# Altium PCB PlanTIeV2.PcbDoc
Units mil, origin at the board's own origin, x right, y up, seen from the top; angles counter-clockwise.
Board outline 1824.05 x 1993.03 mil, 2 copper layers (Top Layer, Bottom Layer); 50 components, 44 nets, 206 pads, 57 vias.
Unrouted connection lines stored in the file: 2.
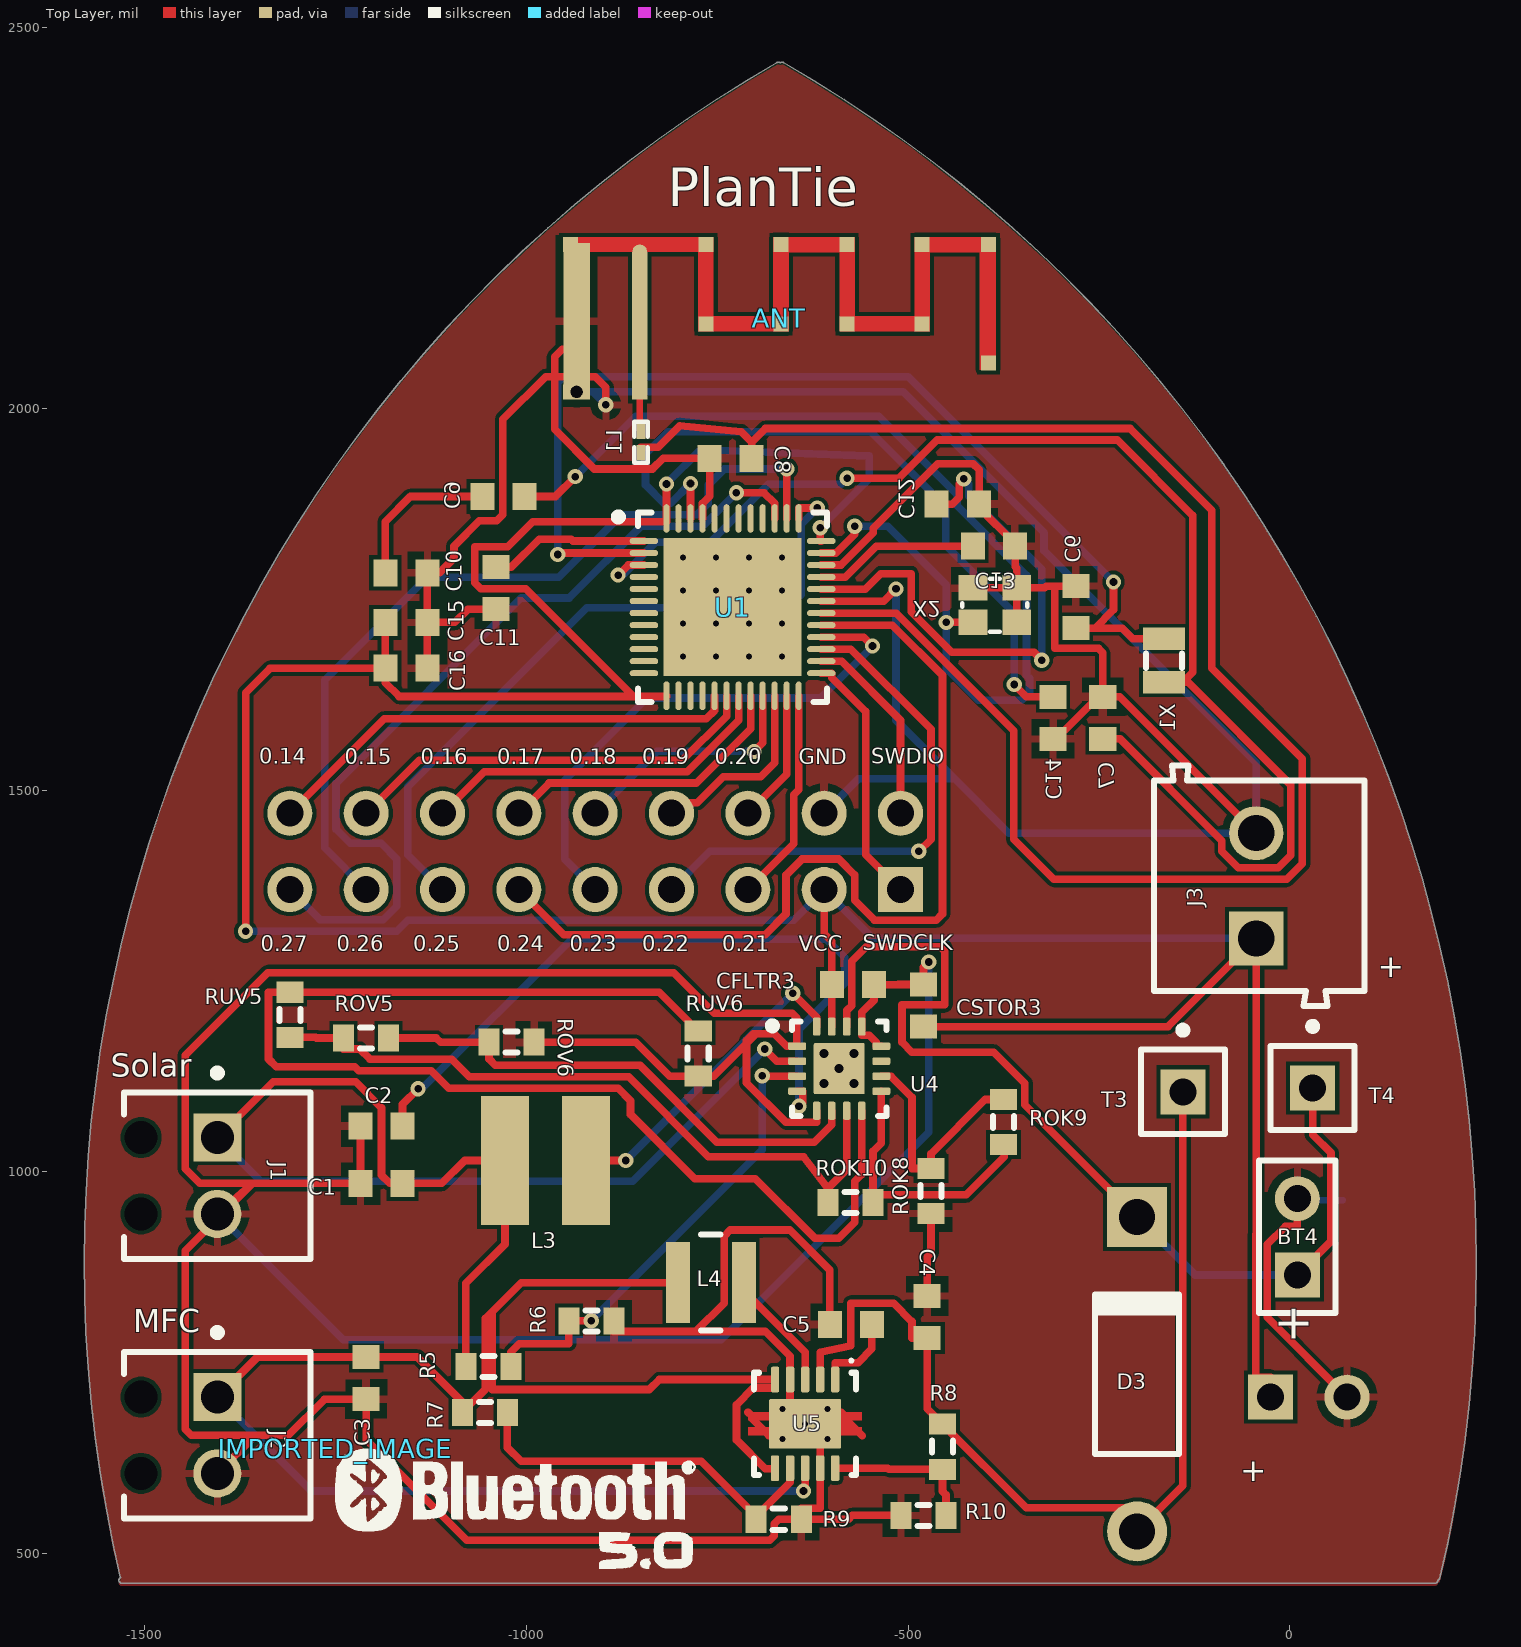
[diagram p0: Top Layer view]
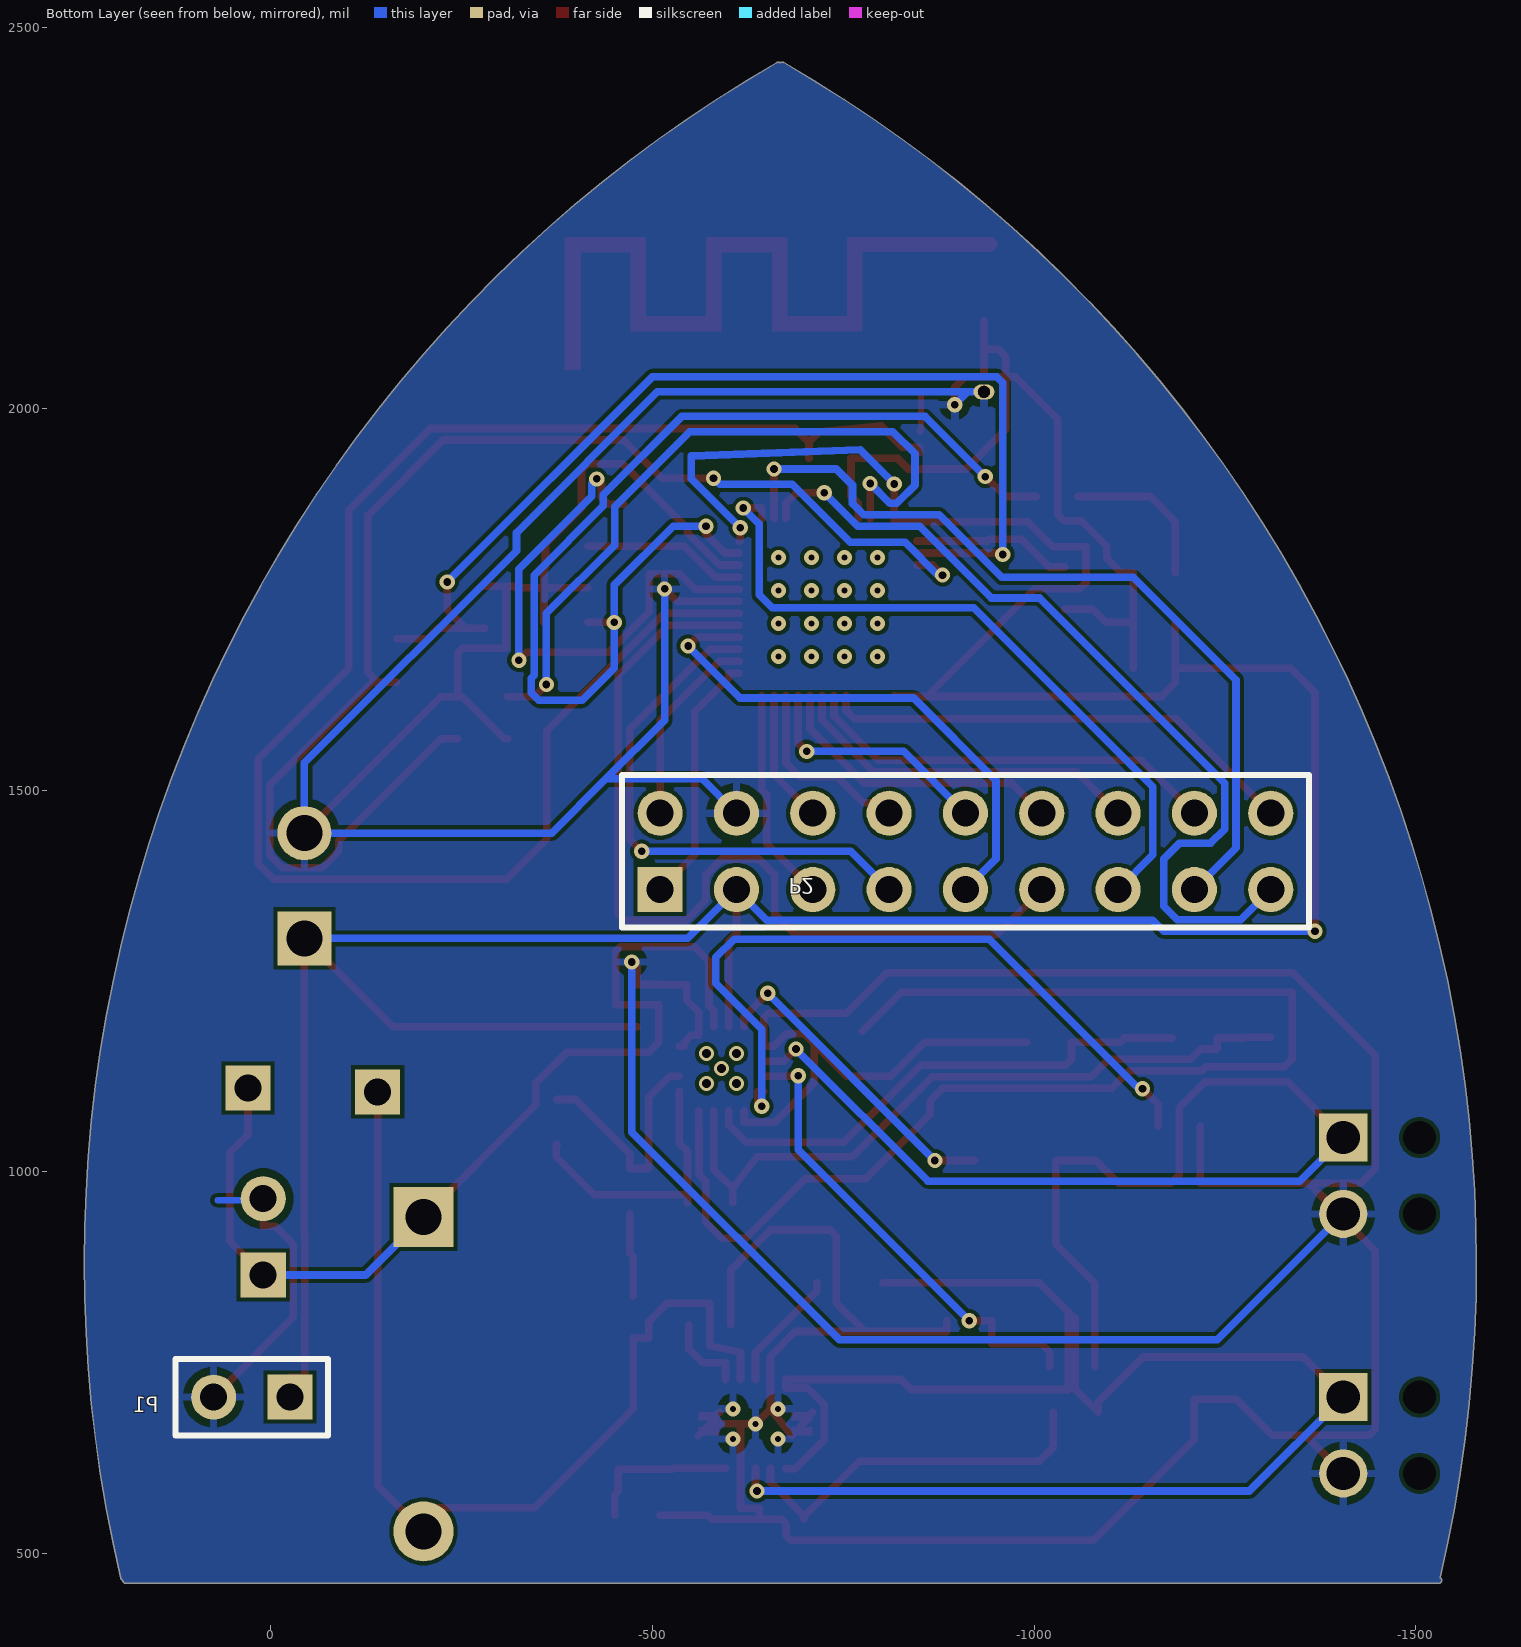
[diagram p1: Bottom Layer view, seen from below]

## Layer stack, top to bottom
Top Solder: solder mask 0.4, Solder Resist, Dk 3.5
Top Layer: signal copper 1.4
Dielectric 1: dielectric 12.6, FR-4, Dk 4.8
Bottom Layer: signal copper 1.4
Bottom Solder: solder mask 0.4, Solder Resist, Dk 3.5

## Board outline
-1530,460.98 cw(c-1530,465) -1531.86,468.56 cw(c-1528.13,470.02) -1532.03,469.11 cw(c235.51,881.61) -672.01,2453.47 cw(c-670,2450) -667.5,2453.14 cw(c-665,2450) -662.99,2453.47 cw(c-1570.51,881.61) 244.52,881.61 cw(c-1570.51,881.61) 196.75,467.91 cw(c192.84,468.82) 194.02,464.99 cw(c190,465) 190,460.99

## Design rules (kind name [scope] priority, off if disabled: settings)
Clearance [All] p1: gap=5 ignorepadtopadclearanceinfootprint=FALSE
PolygonConnect [All] p1: connectstyle=Relief reliefconductorwidth=10 reliefentries=4 polygonreliefangle="90 Angle" airgapwidth=10
RoutingVias [All] p1: holewidth=10 width=20 viastyle="Through Hole" minholewidth=10 minwidth=20 maxholewidth=10 maxwidth=20
SolderMaskExpansion [All] p1: expansion=4 istentingtop=FALSE
Width [All] p1: maxlimit=10 minlimit=10 preferedwidth=10
30 further rules are at their usual default settings.

## Components (designator, comment, footprint, x,y, rotation, side; value= is the part's Value field where it differs from the comment)
ANT "Antenna" BT-AFN -936.62,2032.09 r0 top
BT4 "Battery" BAT-2 10,915 r90 top
C1 "Cap" 1608[0603] -1190,985 r0 top value=100pF
C2 "Cap" 1608[0603] -1190,1060 r0 top value=100pF
C3 "Cap" 1608[0603] -1210,730 r90 top value=10uF
C4 "Cap" 1608[0603] -475,810 r270 top value=10uF
C5 "Cap" 1608[0603] -575,800 r0 top value=1uF
C6 "Cap" 1608[0603] -280,1740 r90 top value=12pF
C7 "Cap" 1608[0603] -245,1595 r90 top value=12pF
C8 "Cap" 1608[0603] -732.56,1935 r180 top value=1.0pF
C9 "Cap" 1608[0603] -1030,1885 r0 top value=12pF
C10 "Cap" 1608[0603] -1157.44,1785 r0 top value=12pF
C11 "Cap" 1608[0603] -1040,1765 r270 top value=100nF
C12 "Cap" 1608[0603] -435,1875 r0 top value=100pF
C13 "Cap" 1608[0603] -387.44,1820 r180 top value=100pF
C14 "Cap" 1608[0603] -310,1595 r270 top value=1.0uF
C15 "Cap" 1608[0603] -1157.44,1720 r0 top value=4.7uF
C16 "Cap" 1608[0603] -1157.44,1660 r0 top value=100nF
CFLTR3 "Cap" 1608[0603] -572.28,1245.43 r0 top value=100pF
CSTOR3 "Cap" 1608[0603] -479.84,1217.99 r90 top value=100pF
D3 "Diodd" DO-41 -200,735 r90 top
IMPORTED_IMAGE "Comment" IMPORTED_IMAGE -1250.48,637.3 r0 top
J1 "1725656" PHOE-1725656-2 -1405,995 r270 top
J2 "1725656" PHOE-1725656-2 -1405,655 r270 top
J3 "691103110002" 691103110002 -40,1375 r90 top
L1 "3.3nH" INDC0603X03L -850,1956.22 r90 top
L3 "744031220" WE-TPC-3816-S -975,1015 r0 top
L4 "LQH3NPZ100MMEL" FP-LQH3NPH_ME-MFG -758.31,855 r180 top
P1 "Header 2" HDR1X2 -25,705 r0 bottom
P2 "Header 9X2" HDR2X9 -510,1370 r180 bottom
R5 "Res3" J1-0603 -1050,745 r0 top value=1K
R6 "Res3" J1-0603 -915,805 r0 top value=1K
R7 "Res3" J1-0603 -1054.53,685 r180 top value=50K
R8 "Res3" J1-0603 -455,640 r90 top value=1M
R9 "Res3" J1-0603 -669.53,545 r180 top value=250K
R10 "Res3" J1-0603 -480,550 r0 top value=180K
ROK8 "Res3" J1-0603 -470,975 r270 top value=1K
ROK9 "Res3" J1-0603 -374.84,1065.43 r90 top value=1K
ROK10 "Res3" J1-0603 -575.47,960 r0 top value=1K
ROV5 "Res3" J1-0603 -1210.31,1175.43 r0 top value=1K
ROV6 "Res3" J1-0603 -1019.53,1170 r0 top value=1K
RUV5 "Res3" J1-0603 -1309.84,1205.91 r90 top value=1K
RUV6 "Res3" J1-0603 -775,1155 r270 top value=1K
T3 "TestPoint" PIN1 -140,1105 r0 top
T4 "TestPoint" PIN1 30,1110 r0 top
U1 "NRF52832-QFAA-R" NRSC-QF-48_M -730,1740 r0 top
U4 "BQ25504RGTT" RGT0016C_V -590.31,1135.32 r0 top
U5 "TPS61200DRCT" DRC0010J_V -635,670 r270 top
X1 "32.768kHz" XTAL_2012 -165,1670 r270 top
X2 "32MHz" BT-XTAL_2016 -386.46,1742.64 r180 top

## Footprints (in the part's own frame and the unit in brackets; to place one, negate y for a bottom-side part, rotate by r counter-clockwise, add the part's x,y. Pads: shape width x height; smd on the part's side, far side on the other; paste and mask are expansions set on the pad)
1608[0603] [mm] "Chip Capacitor, Body 1.6x0.8mm, IPC High Density"
  rect 0.8x0.9 smd: 1(-0.7,0) 2(0.7,0)
  body extent -0.87,-0.48 0.87,0.48, height 1.3
691103110002 [mm] "3,50mm - modular - blue - Horizontal wire entry - Pressure clamp - 8,4mm height - 02p"
  rect 1.8x1.8 hole 1.2: 1(-1.75,0.1)
  round 1.8 hole 1.2: 2(1.75,0.1)
  silkscreen extent -4,-3.5 4,3.5, body extent -4,-3.5 4,3.5, height 8.45
BAT-2 [mm] "Battery; 2 Leads"
  rect 1.5x1.5 hole 0.9: 1(-1.27,0)
  round 1.5 hole 0.9: 2(1.27,0)
  silkscreen extent -2.54,-1.27 2.54,1.27
BT-AFN [mil]
  rect 19.68x19.68 smd: 1(85,-10) ""(-5.55,182.91) ""(85,-10) ""(85,163.23) ""(171.62,78.98) ""(171.62,182.91) ""(270.04,78.98) ""(270.04,182.91) ""(356.65,78.98) ""(356.65,182.91) ""(455.08,78.98) ""(455.08,182.91) ""(541.69,27.8) ""(541.69,182.91)
  oval 19.68x196.85 smd: 1(85,84.49)
  oval 27.56x19.68 hole 15.74: 2(2.32,-10)
  rect 34.65x204.72 smd: 2(2.32,82.52)
  rect 35.43x19.68 smd: GND(2.32,-10)
  Top Layer region: 530.51,18.77 551.7,18.77 551.7,191.41 530.51,191.41
  Top Layer region: 445.23,192.67 445.23,173.02 551.53,173.02 551.53,192.67
  Top Layer region: 358.62,88.81 358.62,69.12 464.96,69.12 464.96,88.81
  Top Layer region: 445.23,192.66 445.23,69.03 464.91,69.03 464.91,192.66
  Top Layer region: 161.78,192.65 161.78,69.03 181.46,69.03 181.46,192.65
  Top Layer region: 161.76,88.72 161.76,69.03 279.87,69.03 279.87,88.72
  Top Layer region: 260.2,192.75 260.2,69.12 279.92,69.12 279.92,192.75
  Top Layer region: 260.15,192.66 260.15,172.97 366.49,172.97 366.49,192.66
  Top Layer region: 346.8,192.66 346.8,69.03 366.49,69.03 366.49,192.66
  Top Layer lines w19.68: -5.55,182.91 2.32,182.91 85,182.91 171.62,182.91
BT-XTAL_2016 [mm]
  rect 0.95x0.85 smd: 1(-0.725,-0.575) 2(0.725,-0.575) 3(0.725,0.575) 4(-0.725,0.575)
  silkscreen extent -1.08,-0.88 1.08,0.88, body extent -1.05,-0.85 1.05,0.85, height 0.56
DO-41 [mm] "Diode, Axial; Body 5.2 x 2.7 mm (LxDia. max), Lead Dia. 0.86 mm (max)"
  round 2 hole 1.2: 1(-5.23,0)
  rect 2x2 hole 1.2: 2(5.23,0)
  silkscreen extent -2.65,-1.4 2.75,1.4
DRC0010J_V [mm] "SON, 10-Leads, Body 3x3mm, Pitch 0.5mm, Thermal Pad 2.4x1.65mm, TI Recommended"
  rrect36% 0.85x0.28 smd paste-0.025 mask+0.07: 1(-1.475,1) 2(-1.475,0.5) 3(-1.475,0) 4(-1.475,-0.5) 5(-1.475,-1) 6(1.475,-1) 7(1.475,-0.5) 8(1.475,0) 9(1.475,0.5) 10(1.475,1)
  rrect6% 1.65x2.4 smd paste-0.825 mask+0.07: 11(0,0)
  Top Layer region: -0.387,1.2 -0.107,1.2 -0.107,1.9 -0.387,1.9
  Top Layer region: 0.393,1.9 0.113,1.9 0.113,1.2 0.393,1.2
  Top Layer region: 0.393,-1.2 0.113,-1.2 0.113,-1.9 0.393,-1.9
  Top Layer region: -0.387,-1.9 -0.107,-1.9 -0.107,-1.2 -0.387,-1.2
  silkscreen extent -2.15,-1.7 1.7,1.7, body extent -1.55,-1.55 1.55,1.55, height 1
FP-LQH3NPH_ME-MFG [mm]
  rect 0.8x2.7 smd paste+0 mask+0: 1(-1.1,0) 2(1.1,0)
  silkscreen extent -0.33,-1.6 0.33,1.6, body extent -1.7,-1.7 1.7,1.7, height 0.25
HDR1X2 [mm] "Connector; Header; 2 Position"
  rect 1.5x1.5 hole 0.9: 1(0,0)
  round 1.5 hole 0.9: 2(2.54,0)
  silkscreen extent -1.27,-1.27 3.81,1.27
HDR2X9 [mm] "Connector; Header; 9x2 Position"
  rect 1.5x1.5 hole 0.9: 1(0,0)
  round 1.5 hole 0.9: 2(0,2.54) 3(2.54,0) 4(2.54,2.54) 5(5.08,0) 6(5.08,2.54) 7(7.62,0) 8(7.62,2.54) 9(10.16,0) 10(10.16,2.54) 11(12.7,0) 12(12.7,2.54) 13(15.24,0) 14(15.24,2.54) 15(17.78,0) 16(17.78,2.54) 17(20.32,0) 18(20.32,2.54)
  silkscreen extent -1.27,-1.27 21.59,3.81
IMPORTED_IMAGE [mil]
  silkscreen extent 0,-157 472,0
INDC0603X03L [mm]
  rect 0.5x0.3 smd: 1(-0.35,0) 2(0.35,0)
  silkscreen extent -0.68,-0.23 0.68,0.23, body extent -0.31,-0.16 0.31,0.16, height 0.26
J1-0603 [mm] "Chip Resistor, Body 1.6x0.8mm, IPC High Density"
  rect 0.7x0.9 smd: 1(-0.75,0) 2(0.75,0)
  silkscreen extent -0.2,-0.35 0.2,0.35, body extent -0.85,-0.48 0.85,0.48, height 0.9
NRSC-QF-48_M [mm] "QFN, 48-Leads, Body 6.00x6.00mm, Pitch 0.40mm, Thermal Pad 4.60x4.60mm, IPC Low Density"
  oval 0.95x0.2 smd: 1(-2.95,2.2) 2(-2.95,1.8) 3(-2.95,1.4) 4(-2.95,1) 5(-2.95,0.6) 6(-2.95,0.2) 7(-2.95,-0.2) 8(-2.95,-0.6) 9(-2.95,-1) 10(-2.95,-1.4) 11(-2.95,-1.8) 12(-2.95,-2.2) 25(2.95,-2.2) 26(2.95,-1.8) 27(2.95,-1.4) 28(2.95,-1) 29(2.95,-0.6) 30(2.95,-0.2) 31(2.95,0.2) 32(2.95,0.6) 33(2.95,1) 34(2.95,1.4) 35(2.95,1.8) 36(2.95,2.2)
  oval 0.2x0.95 smd: 13(-2.2,-2.95) 14(-1.8,-2.95) 15(-1.4,-2.95) 16(-1,-2.95) 17(-0.6,-2.95) 18(-0.2,-2.95) 19(0.2,-2.95) 20(0.6,-2.95) 21(1,-2.95) 22(1.4,-2.95) 23(1.8,-2.95) 24(2.2,-2.95) 37(2.2,2.95) 38(1.8,2.95) 39(1.4,2.95) 40(1,2.95) 41(0.6,2.95) 42(0.2,2.95) 43(-0.2,2.95) 44(-0.6,2.95) 45(-1,2.95) 46(-1.4,2.95) 47(-1.8,2.95) 48(-2.2,2.95)
  rect 4.6x4.6 smd: 49(0,0)
  silkscreen extent -3.92,-3.15 3.15,3.15, body extent -3,-3 3,3, height 0.9
PHOE-1725656-2 [mm] "Connector, 2-Leads, Body 6.2x5.4mm, Pitch 2.54mm"
  rect 1.6x1.6 hole 1.1: 1(-1.27,0)
  round 1.6 hole 1.1: 2(1.27,0)
  round 0 hole 1.1 unplated: MH1(-1.27,-2.54) MH2(1.27,-2.54)
  silkscreen extent -3.54,-3.1 2.77,3.1, body extent -2.77,-3.1 2.77,3.1, height 9
PIN1 [mm] "Generic Antenna; 1 Lead"
  rect 1.5x1.5 hole 0.9: 1(0,0)
  silkscreen extent -1.4,-1.4 1.4,2.17
RGT0016C_V [mm] "QFN, 16-Leads, Body 3x3mm, Pitch 0.5mm, Thermal Pad 1.65x1.65mm"
  rrect40% 0.6x0.25 smd: 1(-1.4,0.75) 2(-1.4,0.25) 3(-1.4,-0.25) 4(-1.4,-0.75) 9(1.4,-0.75) 10(1.4,-0.25) 11(1.4,0.25) 12(1.4,0.75)
  rrect40% 0.25x0.6 smd: 5(-0.75,-1.4) 6(-0.25,-1.4) 7(0.25,-1.4) 8(0.75,-1.4) 13(0.75,1.4) 14(0.25,1.4) 15(-0.25,1.4) 16(-0.75,1.4)
  rrect6% 1.7x1.7 smd paste-0.85: 17(0,0)
  rrect6% 1.55x1.55 on Top Paste: 17(0,0)
  silkscreen extent -2.35,-1.58 1.58,1.58, body extent -1.5,-1.5 1.5,1.5, height 1
WE-TPC-3816-S [mm] "SMD Inductor, 2-Leads, Body 3.8 x 3.8 mm"
  rect 1.6x4.3 smd: 1(-1.35,0) 2(1.35,0)
  body extent -1.9,-1.9 1.9,1.9, height 1.64
XTAL_2012 [mm]
  rect 0.75x1.4 smd: 1(-0.725,0) 2(0.725,0)
  silkscreen extent -0.24,-0.6 0.24,0.6, body extent -1,-0.61 1,0.61, height 0.6

## Part data
BT4: "Multicell Battery", LatestRevisionDate=17-Jul-2002, LatestRevisionNote="Re-released for DXP Platform.", PackageDescription="Battery; 2 Leads", PackageReference=BAT-2, Published=24-Mar-1999, Publisher="Altium Limited"
C1 C2 C3 C4 C5 C6 C7 C8 C9 C10 C11 C12 C13 C14 C15 C16 CFLTR3 CSTOR3: "Capacitor", LatestRevisionDate=17-Jul-2002, LatestRevisionNote="Re-released for DXP Platform.", PackageDescription="Radial Cap, Thru-Hole; 2 Leads; 0.3 in Pin Spacing", PackageReference=RAD-0.3, Published=8-Jun-2000, Publisher="Altium Limited"
D3: library part "Diode 1N4934", "1 Amp Fast Recovery Rectifier", Code_JEDEC=DO-204-AL, ComponentLink1Description="Manufacturer Link", ComponentLink1URL=http://www.fairchildsemi.com/, ComponentLink2Description=Datasheet, ComponentLink2URL=http://www.fairchildsemi.com/ds/1N%2F1N4934.pdf, DatasheetVersion=1999, LatestRevisionDate=17-Jul-2002, LatestRevisionNote="Re-released for DXP Platform.", PackageDescription="Diode, Axial; Body 5.2 x 2.7 mm (LxDia. max), Lead Dia. 0.86 mm (max)", PackageReference=DO-41, PackageVersion=Aug-1999, Published=8-Jun-2000, Publisher="Altium Limited"
J1 J2: library part CMP-2000-05299-1, "Male Header, Pitch 2.54 mm, 1 x 2 Position, Height 9 mm, Tail Length 3.5 mm", Colour=Green, Manufacturer="Phoenix Contact", Content=250pc(s), Datasheet URL=http://datasheet.octopart.com/1725656-Phoenix-Contact-datasheet-5302866.pdf, Datasheet Version=Apr-08, Industrial packaging=Yes, Manufacturer part No.=1725656, Manufacturer URL=http://www.phoenixcontact.com/, Number of contacts=2, Pitch=2.54mm, Type=MPT0,5/2-2,54
J3: library part CMP-1502-03254-1, "Series 1031 - 3.50 mm Horizontal Entry Modular with Pressure Clamp WR-TBL, 2 pin", Manufacturer="Wurth Elektronik", Operating Temperature=-40to105degC, Datasheet URL=http://katalog.we-online.de/em/datasheet/6911031100xx.pdf, Manufacturer URL=http://www.we-online.de, Mounting Technology=THT, Package Reference=691103110002, Packaging=Box, Part Number=691103110002, Pin Number=2, Pitch=3.50mm, Publisher=WurthElektronik
L1: library part L0201-3n3, "High frequency chip inductor ±5%", Artikkelnr Noca=N.A., Artikkelnr Simpro=N.A., Footprint Doc=0201, LatestRevisionDate=2013-04-10, Note="High frequency chip inductor ±5%", Part Number=L0201-3n3, Pin Count=2, Published=2013-04-10, Publisher="Nordic Semiconductor"
L3: library part CMP-0227-00346-1, "SMD Shielded Tiny Power Inductor WE-TPC, L = 22.0 µH", Inductance="22.0 ÂµH", ComponentLink1Description="Manufacturer Link", ComponentLink1URL=http://www.we-online.com, ComponentLink2Description=Datasheet, ComponentLink2URL=http://www.we-online.de/katalog/media/pdf/744031220.pdf, DatasheetVersion="ver 6, Jan-2009", PackageDescription="SMD Inductor, 2-Leads, Body 3.8 x 3.8 mm", PackageReference=WE-TPC-3816-S, PackageVersion=2009
L4: library part CMP-06042-007129-1, "Wire Wound Ferrite Inductor for Power Lines For Automotive 10μH ±20% 0.228Ω 1280mA 1212", Case Code (Imperial)=1212, Case Code (Metric)=3030, Current Rating=1.28A, DC Resistance (DCR)=228mR, Inductance=10uH, Max Operating Temperature=85°C, Min Operating Temperature=-40°C, Ratings=AEC-Q200, Resistor Type=Wirewound, Saturation Current=810mA, Self Resonant Frequency=20MHz, Test Frequency=1MHz, Tolerance=20%, Case/Package=1212, Core Material=Ferrite, Mount="Surface Mount", Packaging="Cut Tape", Shielding=Shielded
P1: "Header, 2-Pin", LatestRevisionDate=17-Jul-2002, LatestRevisionNote="Re-released for DXP Platform.", Publisher="Altium Limited"
P2: "Header, 9-Pin, Dual row", LatestRevisionDate=17-Jul-2002, LatestRevisionNote="Re-released for DXP Platform.", Publisher="Altium Limited"
R5 R6 R7 R8 R9 R10 ROK8 ROK9 ROK10 ROV5 ROV6 RUV5 RUV6: "Resistor", LatestRevisionDate=29-May-2009, LatestRevisionNote="IPC-7351 Footprint Added.", PackageDescription="Chip Resistor", PackageReference=J1-0603, Published=8-Jun-2000, Publisher="Altium Limited"
U1: library part CMP-2100-03661-1, "Multiprotocol Bluetooth Smart, ANT/ANT+ and Proprietary System-on-Chip, 2.4 GHz, 256 KB FLASH, 1.7 to 3.6 V, -40 to 85 degC, 48-Pin QFN, RoHS, Tape and Reel", Frequency=2.4GHz, Manufacturer="Nordic Semiconductor", Max Operating Temperature=85degC, Min Operating Temperature=-40degC, Package Description="48-Pin Quad Flat No-lead Package, Body 6 x 6 mm, Pitch 0.4 mm, Thermal Pad 4.6 x 4.6 mm", Package Reference=QF-48, Datasheet URL=http://infocenter.nordicsemi.com/pdf/nRF52832_PS_v1.0.pdf, Datasheet Version="Rev. 1.0, 02/2016", Lead Free=LeadFree, Manufacturer URL=http://www.nordicsemi.com/eng/Products/, Max Frequency=2.4GHz, Mount=SurfaceMount, Packaging=TapeandReel, RoHSCompliant=true
U4: library part CMP-0321-00258-2, "Ultra Low Power Boost Converter with Battery Management for Energy Harvester App, 0.13 V, -40 to 85 degC, 16-pin QFN (RGT), Green (RoHS & no Sb/Br)", Manufacturer="Texas Instruments", Over Voltage Protection=N, Code_JEDEC=MO-220, ComponentLink1Description=Datasheet, ComponentLink1URL=http://www.ti.com/general/docs/lit/getliterature.tsp?genericPartNumber=BQ25504&fileType=pdf, DatasheetVersion=SLUSAH0, Eco-Plan="Green (RoHS & no Sb/Br)", Lead Acid=N, Li-Ion=N, Li-Polymer=N, Mounting Technology="Surface Mount", NiCd=N, NiMH=N, PackageDescription="16-Pin Plastic Quad Flat No-Lead, 3 x 3 mm Body, 0.5 mm Pitch, 1.7 x 1.7 mm Exposed Pad", PackageReference=RGT0016C, PackageVersion="revH, Oct-2011", PartNumber=BQ25504RGTT, SubFamily="Battery Charge Management", Vin(Min)(V)=0.13
U5: library part CMP-0347-00023-2, "Boost Voltage Converter with 0.3 to 5.5 V Input and 1.8 to 5.5 V Output, -40 to 85 degC, 10-Pin SON (DRC), Green (RoHS & no Sb/Br)", Manufacturer="Texas Instruments", Switching Frequency(Max)(kHz)=1250, ComponentLink1Description=Datasheet, ComponentLink1URL=http://www.ti.com/general/docs/lit/getliterature.tsp?genericPartNumber=TPS61200&fileType=pdf, ComponentLink2Description="Package Specification", ComponentLink2URL=http://www.ti.com/litv/pdf/mpds117k, DatasheetVersion=SLVS577B, Eco-Plan="Green (RoHS & no Sb/Br)", Mounting Technology="Surface Mount", PackageDescription="10-Pin Plastic Small Outline No-Lead, 3 x 3 x 1 mm Body, 0.5 mm Pitch, Exposed Pad", PackageReference=DRC0010J, PackageVersion="revL, Sep-2011", PartNumber=TPS61200DRCT, Regulated Outputs(#)=1, SubFamily="Step-Up Regulator", Synchronous Rectification=TRUE, Topology=Boost, Vin(Max)(V)=5.5, Vin(Min)(V)=0.3, Vout(Max)(V)=5.5, Vout(Min)(V)=1.8
X1: library part XTAL_SMD2012_32.768kHz_9pF_Seiko, "XTAL SMD 2012, 32.768kHz, Cl=9pF, Total Tol: ±50ppm", Manufacturer=Seiko, Manufacturer Part Number=SC20S-9.0PF20PPM, Artikkelnr Noca=N.A., Artikkelnr Simpro=N.A., Datasheet=http://www.sii.co.jp/en/quartz/files/2013/03/file_PRODUCT_MASTER_50811_GRAPHIC03.pdf, Footprint Doc=XTAL_2012, LatestRevisionDate=2015-10-15, Note="XTAL SMD 32.768kHz, 2012", Part Number=XTAL_SMD2012_32.768kHz_9pF_Seiko, Pin Count=2, Published=2015-10-15, Publisher="Nordic Semiconductor"
X2: library part XTAL_SMD2016_32MHz_8pF_Epson, "XTAL SMD 2016, 32MHz, Cl=8pF, Total Tol: ±40ppm", Manufacturer="Epson Toyocom", Manufacturer Part Number=Q22FA12800025, Supplier part number=171-2806, Artikkelnr Noca=N.A., Artikkelnr Simpro=N.A., Datasheet=http://www.epsondevice.com/docs/qd/en/DownloadServlet?id=ID000449, Footprint Doc=XTAL_2016, LatestRevisionDate=2014-11-27, Note="XTAL SMD 32.000MHz", Part Number=XTAL_SMD2016_32MHz_8pF_Epson, Pin Count=4, Published=2012-03-09, Publisher="Nordic Semiconductor", Supplier=Farnell

## Via types
v1: diameter 20, hole 10, Top Layer to Bottom Layer, 31 vias
v2: diameter 19.68, hole 7.87, Top Layer to Bottom Layer, 21 vias
v3: diameter 19.68, hole 11.81, Top Layer to Bottom Layer, 5 vias

## Nets (pads, with @x,y where several pads share a name; then routed paths per layer and width w, separated by ;. In a path a pad name is that pad's centre, name@x,y a point inside that pad or via, vN(x,y) a via of type N, cw(c..) or ccw(c..) an arc to the next point about the centre after c; other vN are vias at no path point)
GND: ANT.2 BT4.2 C1.1 C2.1 C3.1 C4.1 C5.1 C6.2 C7.2 C8.2 C10.2 C11.2 C12.2 C13.1 C14.2 C15.2 C16.2 CFLTR3.2 CSTOR3.2 J1.2 J2.2 J3.2 P1.2 P2.4 R6.2 R9.1 R10.1 ROK8.2 ROV6.2 RUV6.2 U1.31 U1.34 U1.45 U4.1 U4.5 U4.12 U4.13 U5.4 U5.9 U5.11 X2.1 X2.2 X2.4 | length 11192.6
  Top Layer w10: J2.2 -1355,655 ; J1.2 -1359,985 ; C2.1 C1.1 -1359,985 ; C16.2 C15.2 ; C11.2 -1076.56,1737.44 -1094,1720 C15.2 ; ROV6.2 -856.73,1170 -812.2,1125.47 RUV6.2 -754.53,1125.47 -711.84,1168.16 ; ANT.2@-934.3,2114.61 ANT.2@-934.3,2078 ; v1(-896,2005) -896,2028 -910,2042 ANT.2@-934.3,2042 ; R6.2 -885.47,791 -778,791 ; U1.45 -769.37,1876.11 -760.12,1885.36 C8.2 -821,1935 -835,1921 -911,1921 -963,1973 -963,2042 ; -709.8,685.24 -704.29,679.73 -704.29,676.58 -682.24,654.53 -658.43,684.91 -656.75,687.05 U5.11@-654.68,689.68 ; U4.1 U4.1@-646,1164.84 ; U4.5 -619.84,1065.07 -660,1065.07 -711.84,1116.91 -711.84,1168.16 ; U1.31 -531.87,1747.87 v1(-515.87,1763.87) ; U1.34 -588,1795.12 -545.83,1837.28 -545.83,1843.17 -461,1928 -415,1928 -407,1920 -407,1875 C12.2 -407.44,1870.56 -359.88,1823 C13.1 -359.88,1792.97 -357.91,1791 X2.1 ; C5.1 -602.56,871.56 -655,924 -733,924 -741,916 -741,828 -778,791 ; -587.76,685.24 -582.24,679.73 -582.24,676.58 -575.66,670 ; -560.2,654.53 -575.66,670 ; U4.12 -542,1164.84 -542,1170 -551,1179 -560.79,1179 U4.13 -560.79,1209 -544.72,1225.06 CFLTR3.2 -513,1245.43 -512.88,1245.55 CSTOR3.2 -479.84,1268.16 v1(-473,1275) ; R10.1 -573,550 -578,545 R9.1 ; C4.1 -475,889 -470,894 ROK8.2 ; X2.2 X2.1 ; X2.4 X2.1 ; C14.2 -306,1567.44 -250.88,1622.56 C7.2 ; C6.2 -308,1767.56 ; J3.2 -222.6,1622.56 C7.2 ; BT4.2 10,929 -5.53,929 -29.53,905 -29.53,809.53 P1.2 ; -1359,985 -1428,985 -1447,1004 -1447,1153 -1339,1261 -807,1261 -754,1208 -652,1208 -646,1202 U4.1@-646,1164.84 ; -1359,985 -1447,897 -1447,663 -1439,655 -1355,655 ; -1355,655 -1312,655 -1264.56,702.44 C3.1 -1210,649 -1078.28,517.28 -681.13,517.28 -675.28,523.14 -675.28,539.14 -669.42,545 R9.1 ; C15.2 C10.2 -1114,1785 -1095,1804 -1095,1820 -1062,1853 -1039,1853 -1031,1861 -1031,1986 -975,2042 -963,2042 ; -963,2042 ANT.2@-934.3,2042 ; -963,2042 -963,2068 -953,2078 ANT.2@-934.3,2078 ; ANT.2@-934.3,2042 ANT.2@-934.3,2078 ; -778,791 -687,791 -654.68,758.68 U5.4 U5.11@-654.68,689.69 ; -711.84,1168.16 -711.84,1172.16 -703,1181 -699,1181 ; -711.84,1168.16 -699,1181 ; -699,1181 -675.16,1181 -659,1164.84 U4.1@-646,1164.84 ; U5.11@-654.68,689.68 v2(-635,670) U5.11@-615.31,670 ; R9.1 -640,559.19 -615.31,559.19 U5.9 U5.11@-615.31,670 ; U5.11@-615.31,670 -575.66,670 ; X2.1 -321,1765.28 -318.72,1767.56 -308,1767.56 ; -308,1767.56 -308,1686 -250.67,1686 -245,1680.33 C7.2
  Bottom Layer w10: J1.2 -1240,780 -745,780 -473,1052 v1(-473,1275) ; ANT.2@-934.3,2022.09 -913.09,2022.09 ; v1(-896,2005) -913.09,2022.09 ; P2.4 -565,1515 -439,1515 ; v1(-515.87,1763.87) -515.87,1591.87 -439,1515 ; -913.09,2022.09 -506.47,2022.09 -321.91,1837.53 -321.91,1813.91 -43.94,1535.94 J3.2 -367.9,1443.9 -439,1515
  other v2: -664.53,650.32 -605.47,650.32 -664.53,689.69 -605.47,689.69
NetANT_1: ANT.1 L1.2
NetBT4_1: BT4.1 D3.2 T4.1 U4.14 | length 1329.6
  Top Layer w10: U4.14 -580.47,1211.53 -574,1218 -574,1276 -555,1295 -457.86,1295 -452,1289.14 -452,1219 -508,1219 -508,1170 -495,1157 -388,1157 -347,1116 -347,1087.91 D3.2 ; BT4.1 54,909 54,1025 30,1049 T4.1
  Bottom Layer w10: D3.2 -124.09,865 BT4.1
NetC1_2: C1.2 J1.1 L3.1 R5.1 U4.2 | length 1678.8
  Top Layer w10: J1.1 -1332,1118 -1224,1118 -1190,1084 -1190,996 -1179,985 C1.2 -1111,985 -1081,1015 L3.1 -1028.15,905.38 -1079.53,854 R5.1 ; v1(-688,1161) -672.16,1145.16 U4.2
  Bottom Layer w10: J1.1 -1348,988 -861,988 v1(-688,1161)
NetC2_2: C2.2 U4.4 | length 956.7
  Top Layer w10: C2.2 -1162.44,1088.56 v1(-1142,1109) ; U4.4 -638,1105.79 -638,1091 v1(-643,1086)
  Bottom Layer w10: v1(-1142,1109) -1137,1109 -941,1305 -607,1305 -583,1281 -583,1247 -643,1187 v1(-643,1086)
NetC3_2: C3.2 J2.1 L4.2 R7.2 U5.5 U5.6 U5.8 | length 2299.7
  Top Layer w10: J2.1 -1352.44,757.56 C3.2 -1143,757.56 -1084.06,698.61 R7.2 -1054.06,715 -1054.06,807.94 -1045,817 ; L4.2 -1007,855 -1045,817 ; U5.6 -674.37,611 -687,611 -724.8,648.8 -724.8,695.2 -703,717 -674.37,717 U5.5@-674.37,728 ; U5.5 U5.5@-674.37,728 ; v1(-637,582) -635,584 U5.8 ; -1045,817 -1045,715 -839,715 -826,728 U5.5@-674.37,728
  Bottom Layer w10: J2.1 -1282,582 v1(-637,582)
NetC4_2: C4.2 D3.1 R8.2 T3.1 U5.2 | length 1317.5
  Top Layer w10: U5.2 -615.31,764 -575,772.28 -575,828 -519,828 -495,804 -495,782.44 C4.2 -475,689.53 R8.2 -345.47,560 -200,560 D3.1 -140,589.09 T3.1
NetC5_2: C5.2 U5.1 | length 109.5
  Top Layer w10: U5.1 -595.63,750 -565.62,750 -547.44,768.18 C5.2
NetC6_1: C6.1 U1.2 X1.1 | length 1372.6
  Top Layer w10: v1(-959,1809) -957.13,1810.87 U1.2 ; C6.1 -255,1712.44 ; v1(-231,1773) -231,1736.44 -255,1712.44 ; X1.1 -205.67,1698.54 -219.57,1712.44 -255,1712.44
  Bottom Layer w10: v1(-959,1809) -959,2034 -951,2042 -500,2042 v1(-231,1773)
NetC7_1: C7.1 U1.3 X1.2 | length 1776.3
  Top Layer w10: v1(-880,1782) -866.88,1795.12 U1.3 ; v1(-580,1909) -512,1909 -462,1959 -226,1959 -127,1860 -127,1654.46 X1.2@-140,1641.46 ; C7.1 -222.44,1567.44 -89,1434 -89,1420 -67.46,1398.46 -15,1398.46 1.5,1414.96 1.5,1506.96 -133,1641.46 X1.2@-140,1641.46 ; X1.2 X1.2@-140,1641.46
  Bottom Layer w10: v1(-880,1782) -874,1782 -831,1825 -759.19,1825 -683.19,1901 -588,1901 v1(-580,1909)
NetC8_1: C8.1 L1.1 U1.30 | length 2224.3
  Top Layer w10: L1.1 -850,1949.51 -827.58,1949.51 -799.37,1977.72 -718.72,1969.72 -705,1956 ; C8.1 -705,1956 ; U1.30 -515.34,1732.13 -361.46,1578.25 -361.46,1436 -308.93,1383.46 -4.04,1383.46 16.5,1404 16.5,1541.5 -102,1660 -102,1867 -209,1974 -687,1974 -705,1956
NetC9_1: C9.1 C10.1 | length 208.1
  Top Layer w10: C10.1 -1185,1852 -1152,1885 C9.1
NetC9_2: C9.2 U1.35 X2.3 | length 1442
  Top Layer w10: C9.2 -962,1885 v1(-936,1911) ; U1.35 -595,1810.87 -570.1,1835.76 v1(-570.1,1846) ; v1(-450,1720) X2.3
  Bottom Layer w10: v1(-936,1911) -857,1990 -538.65,1990 -435.65,1887 -435.65,1872.65 -345,1782 -345,1650.78 -341,1646.78 -341,1628 -351,1618 -408,1618 -450,1660 v1(-450,1720) -450,1769 -527,1846 v1(-570.1,1846)
NetC11_1: C11.1 U1.1 | length 209.9
  Top Layer w10: C11.1 -1019.93,1792.56 -983.49,1829 -941.39,1829 -939,1826.61 U1.1
NetC12_1: C12.1 U1.32 | length 712.8
  Top Layer w10: U1.32 -556.13,1763.62 -535.87,1783.87 -495.87,1783.87 -495.87,1733.87 -442.65,1680.65 -335.11,1680.65 v1(-325,1670.55) ; C12.1 -442.19,1875 -433.19,1884 -433.19,1901.81 v1(-427,1908)
  Bottom Layer w10: v1(-427,1908) -420.65,1901.65 -420.65,1885.31 -325,1789.66 v1(-325,1670.55)
NetC13_2: C13.2 U1.33 | length 215.7
  Top Layer w10: U1.33 -582.53,1779.37 -541.9,1820 C13.2
NetC14_1: C14.1 U1.46 | length 940.4
  Top Layer w10: U1.46 v1(-785.12,1902) ; v1(-361,1638.56) -345,1622.56 C14.1
  Bottom Layer w10: v1(-785.12,1902) -811.12,1876 -820,1876 -844,1900 -844,1941 -815,1970 -549,1970 -450.65,1871.65 -450.65,1821.37 -361,1731.72 v1(-361,1638.56)
NetC15_1: C15.1 C16.1 CFLTR3.1 CSTOR3.1 J3.1 P1.1 P2.3 U1.13 U1.36 U1.48 U4.15 | length 4680.6
  Top Layer w10: v1(-1368,1315.47) -1368,1628 -1336,1660 C16.1 ; C15.1 C16.1 ; U1.13 -816.61,1623 -860,1623 ; v1(-816.61,1901.39) U1.48 -816.61,1852 -991.54,1852 -1024.54,1819 -1068,1819 -1068,1772 -1060,1764 -1001,1764 -860,1623 ; v1(-615,1844) -615,1826.61 U1.36 ; P2.3 -610,1312.16 -599.84,1302 CFLTR3.1 -599.84,1194.17 -600.16,1193.86 U4.15 ; CSTOR3.1 -159.6,1190.43 J3.1 -43.94,918.59 -44.53,918 -44.53,731 -25,731 P1.1 ; C16.1 -1185,1641 -1167,1623 -860,1623
  Bottom Layer w10: v1(-1368,1315.47) -1170,1315.47 -1155.47,1330 -650,1330 P2.3 -546.1,1306.1 J3.1 ; v1(-816.61,1901.39) -772.02,1945.98 -551,1938 -551,1908 v1(-615,1844)
NetL3_2: L3.2 U4.16 | length 418
  Top Layer w10: L3.2 v1(-870,1015) ; v1(-651,1234) -619.84,1202.84 U4.16
  Bottom Layer w10: v1(-870,1015) v1(-651,1234)
NetL4_1: L4.1 U5.3 | length 160.1
  Top Layer w10: L4.1 -715,844 -635,764 U5.3
NetR5_2: R5.2 R6.1 U4.3 | length 618.6
  Top Layer w10: R5.2 -1020.47,764 -1009.47,775 -944.53,775 R6.1 v1(-915,805) ; v1(-691,1126) -690.47,1125.47 U4.3
  Bottom Layer w10: v1(-915,805) -691,1029 v1(-691,1126)
NetR7_1: R7.1 R9.2 U5.7 | length 498.5
  Top Layer w10: R7.1 -1025,639 -1007,621 -771.12,621 -699.06,548.94 R9.2 -699.06,549 -654.68,593.37 U5.7
NetR8_1: R8.1 R10.2 U5.10 | length 203.6
  Top Layer w10: U5.10 -527,611.93 -525.54,610.47 R8.1 -455,581.53 -450.47,577 R10.2
NetROK8_1: ROK8.1 ROK9.2 U4.10 | length 314
  Top Layer w10: U4.10 -522.47,1125.47 -495,1098 -495,1004.53 ROK8.1 -470,1023.96 -399,1094.96 ROK9.2
NetROK9_1: ROK9.1 ROK10.2 U4.9 | length 359.6
  Top Layer w10: ROK10.2 ROK10.2@-545.94,970 ; U4.9 -535.2,1037.75 -545.94,1027 ROK10.2@-545.94,970 ; ROK9.1 -374,1035.91 -374,1020 -424,970 ROK10.2@-545.94,970
NetROK10_1: ROK10.1 ROV5.1 RUV5.1 U4.7 | length 928.8
  Top Layer w10: RUV5.1 -1276,1176.38 -1275.06,1175.43 ROV5.1 -1239.84,1161 -1218.28,1161 -1205,1147.72 -1098.07,1147.72 -1075,1124.65 -866.29,1124.65 -761.64,1020 -637,1020 -605,978.51 ; ROK10.1 -605,978.51 ; U4.7 -580.47,1003.04 -605,978.51
NetROV5_2: ROV5.2 ROV6.1 U4.6 | length 677.8
  Top Layer w10: ROV5.2 -1118,1175.43 -1112.57,1170 ROV6.1 -1049.06,1148 -1040.7,1139.65 -851.29,1139.65 -750.64,1039 -623,1039 -600.16,1061.84 U4.6
NetRUV5_2: RUV5.2 RUV6.1 U4.8 | length 1706.1
  Top Layer w10: RUV6.1 -825.91,1235.43 RUV5.2 -1338,1235.43 -1338,1148 -1328,1138 -1224.85,1138 -1219.57,1132.72 -1124.78,1132.72 -1101.71,1109.65 -880,1109.65 -863.72,1093.37 -863.72,1075.32 -779.5,991.1 -700.1,991.1 -622,913 -591,913 -569.73,934.27 -569.73,988 -561,996.73 -561,1056 -560.79,1056.21 U4.8
P0.14: P2.18 U1.17 | length 631.4
  Top Layer w10: P2.18 -1186.32,1593.68 -764.52,1593.68 -753.62,1604.57 U1.17
P0.15: P2.16 U1.18 | length 551.4
  Top Layer w10: P2.16 -1140.47,1539.53 -795.67,1539.53 -737.87,1597.32 U1.18
P0.16: P2.14 U1.19 | length 470.4
  Top Layer w10: P2.14 -1055.47,1524.53 -789.45,1524.53 -722.13,1591.86 U1.19
P0.17: P2.12 U1.20 | length 392.7
  Top Layer w10: P2.12 -970.47,1509.53 -777.47,1509.53 -706.38,1580.62 U1.20
P0.18: P2.10 U1.21 | length 319.1
  Top Layer w10: v1(-702,1551) -690.63,1562.37 U1.21
  Bottom Layer w10: P2.10 -829,1551 v1(-702,1551)
P0.19: P2.8 U1.22 | length 250.1
  Top Layer w10: P2.8 -796.22,1483.78 -776.22,1483.78 -742,1518 -693.2,1518 -674.88,1536.31 U1.22
P0.20: P2.6 U1.23 | length 174.9
  Top Layer w10: P2.6 -659.13,1520.87 U1.23
P0.21: P2.5 U1.24 | length 281.5
  Top Layer w10: P2.5 -649.88,1430.12 -649.88,1494.2 -643.39,1500.7 U1.24
P0.22: P2.7 U1.27 | length 698.6
  Top Layer w10: U1.27 -575,1684.88 -470,1579.88 -470,1436 v1(-486,1420)
  Bottom Layer w10: P2.7 -760,1420 v1(-486,1420)
P0.23: P2.9 U1.28 | length 707.9
  Top Layer w10: U1.28 -558.26,1700.63 v1(-546.63,1689)
  Bottom Layer w10: P2.9 -950,1410 -950,1513 -842,1621 -614.63,1621 v1(-546.63,1689)
P0.24: P2.11 U1.29 | length 1204.8
  Top Layer w10: P2.11 -951,1311 -687,1311 -660,1338 -660,1389 -639,1410 -591,1410 -570,1389 -570,1356 -544,1330 -463,1330 -455,1338 -455,1650.57 -520.81,1716.38 U1.29
P0.25: P2.13 U1.37 | length 933.6
  Top Layer w10: U1.37 -643.39,1869.84 v1(-619,1869.84)
  Bottom Layer w10: P2.13 -1155.47,1415.47 -1155.47,1504.53 -921,1739 -657,1739 -640,1756 -640,1848.84 v1(-619,1869.84)
P0.26: P2.15 U1.38 | length 1096
  Top Layer w10: U1.38 v1(-659.13,1921)
  Bottom Layer w10: P2.15 -1264.53,1424.53 -1264.53,1644.47 -1130,1779 -957.53,1779 -875.53,1861 -776.85,1861 -762,1875.85 -762,1900 -741,1921 v1(-659.13,1921)
P0.27: P2.17 U1.39 | length 1139.7
  Top Layer w10: v1(-725,1890) -688.88,1890 -674.88,1876 U1.39
  Bottom Layer w10: P2.17 -1270.47,1330.47 -1187.53,1330.47 -1170,1348 -1170,1410 -1190.47,1430.47 -1231,1430.47 -1249.53,1449 -1249.53,1509.47 -1007,1752 -944,1752 -850,1846 -769,1846 v1(-725,1890)
SWDCLK: P2.1 U1.25 | length 334.5
  Top Layer w10: U1.25 -600,1653.39 -600,1647.76 -555.47,1603.23 -555.47,1415.47 P2.1
SWDIO: P2.2 U1.26 | length 257.7
  Top Layer w10: U1.26 -587.26,1669.13 -510,1591.87 P2.2
pads on no net: ANT. ANT.GND J1.MH1 J1.MH2 J2.MH1 J2.MH2 U1.4 U1.5 U1.6 U1.7 U1.8 U1.9 U1.10 U1.11 U1.12 U1.14 U1.15 U1.16 U1.40 U1.41 U1.42 U1.43 U1.44 U1.47 U1.49 U4.11 U4.17
copper on no net: | length 119.1
  Top Layer w8: -851.62,1971.62 ccw(c-850,1971.62) -850,1970 ; -851.62,2022.09 -851.62,1973.24 ccw(c-850,1973.24) -850,1971.62
  Bottom Layer w8: 10,965 cw(c7.98,965) 7.98,962.98 70,962.98
  other v2: -794.96,1675.04 -751.65,1675.04 -708.35,1675.04 -665.04,1675.04 -794.96,1718.35 -751.65,1718.35 -708.35,1718.35 -665.04,1718.35 -794.96,1761.65 -751.65,1761.65 -708.35,1761.65 -665.04,1761.65 -794.96,1804.96 -751.65,1804.96 -708.35,1804.96 -665.04,1804.96
  other v3: -610,1115.63 -570.63,1115.63 -590.31,1135.32 -610,1155 -570.63,1155

## Polygon pours and split planes (outlines as drawn)
GND on Bottom Layer "GND_L02_P001" (solid, pour order 1): -1530,460.98 cw(c-1530,465) -1531.86,468.56 cw(c-1528.13,470.02) -1532.03,469.11 cw(c235.51,881.61) -672.01,2453.47 cw(c-670,2450) -667.5,2453.14 cw(c-665,2450) -662.99,2453.47 cw(c-1570.51,881.61) 244.52,881.61 cw(c-1570.51,881.61) 196.75,467.91 cw(c192.84,468.82) 194.02,464.99 cw(c190,465) 190,460.99
GND on Top Layer "GND_L01_P000" (solid, remove dead copper, pour order 0): -1529.89,457.7 cw(c-1529.89,461.71) -1531.74,465.27 cw(c-1528.02,466.73) -1531.91,465.83 cw(c235.63,878.32) -671.89,2450.18 cw(c-669.89,2446.71) -667.39,2449.85 cw(c-664.89,2446.71) -662.88,2450.18 cw(c-1570.4,878.32) 244.64,878.32 cw(c-1570.4,878.32) 196.86,464.62 cw(c192.96,465.53) 194.13,461.7 cw(c190.11,461.71) 190.11,457.7

## Silkscreen, mask and mechanical layers (free items; w line width, h text height)
Top Overlay:
  text "PlanTie" at -815,2265 h50
  text "0.14" at -1350,1535 h20
  text "SWDIO" at -548.37,1535 h20
  text "0.15" at -1238.37,1534.06 h20
  text "0.16" at -1138.37,1534.06 h20
  text "0.17" at -1038.37,1534.06 h20
  text "0.18" at -943.37,1534.06 h20
  text "0.19" at -848.37,1534.06 h20
  text "0.20" at -753.37,1534.06 h20
  text "GND" at -643.37,1534.06 h20
  text "SWDCLK" at -559.5,1290.5 h20
  text "0.27" at -1348.37,1289.06 h20
  text "0.26" at -1248.37,1289.06 h20
  text "0.25" at -1148.37,1289.06 h20
  text "0.24" at -1038.37,1289.06 h20
  text "0.23" at -943.37,1289.06 h20
  text "0.22" at -848.37,1289.06 h20
  text "0.21" at -743.37,1289.06 h20
  text "VCC" at -643.37,1289.06 h20
  text "+" at 115,1255 h30
  text "Solar" at -1545,1125 h30
  text "MFC" at -1515,790 h30
  text "+" at -65,595 h30
Mechanical 1:
  lines w7.99: -1528.12,470.03 cw(c235.51,881.61) -670,2450 ; -665,2450 cw(c-1570.51,881.61) 192.84,468.82
  lines w8: -1530,465 190,465

## Text inside footprints (layer, text, board x,y; h text height)
BT4: Top Overlay "+" at 25,775 h45.28 r90